# EAGLE board mtr (EAGLE 9.6.2)
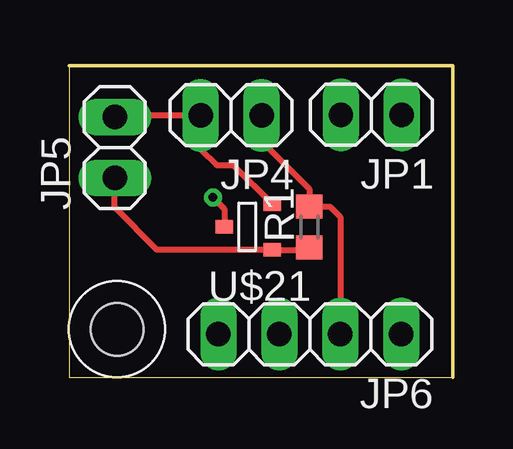
[diagram p0: board, top side]
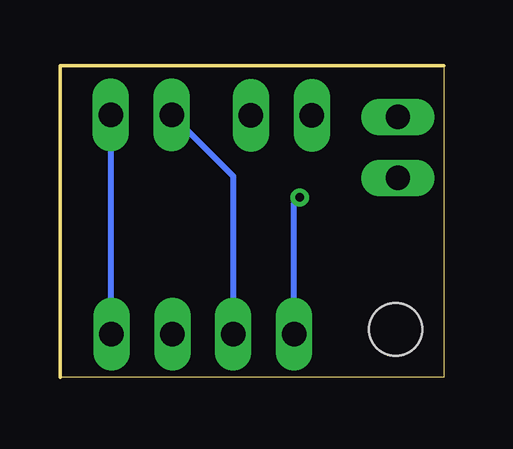
[diagram p1: board, bottom side, seen from below]

Size 16 x 13 mm. Coordinates in mm from the lower left corner, seen from the top.
Outline: 0,0 16,0 16,13 0,13 0,0
Copper layers (1*16): Top 0.035mm / dielectric 1.5mm / Bottom 0.035mm
Design rules "default *": minimum track width 0.25mm, minimum drill 0.35mm, track to track 0.2mm, track to pad 0.2mm, pad to pad 0.15mm, via to via 0.2mm, smd to smd 0.2mm, copper to edge 0.25mm, drill to drill 0.1mm, minimum pad ring 10mil, minimum via ring 8mil, stop-mask expansion 4mil, vias tented up to drill 0mil, thermal gap 10mil
Holes 2.2 mm at 2,2

## Footprints (pad centres in the part's own frame; a part is rotated, then mirrored left to right if it is on the bottom)
1X02 = drill 1.016 long: 1 -1.27,0; 2 1.27,0
1X04 = drill 1.016 long: 1 -3.81,0; 2 -1.27,0; 3 1.27,0; 4 3.81,0
R0603 = smd 1 x 1.1: 1 -0.85,0; 2 0.85,0
SI2302CDS = smd 0.56 x 0.73: 1 -0.95,-1; 2 0.95,-1; 3 0,1

## Placement (x,y rotation side)
JP1  [1X02]  12.61,10.95 180 top
JP4  [1X02]  6.76,10.93 180 top
JP5  [1X02]  1.91,9.59 90 top
JP6  [1X04]  10.04,1.79 180 top
R1  10k  [R0603]  10.02,6.27 90 top
U$21  SI2302CDS  [SI2302CDS]  7.48,6.27 90 top

## Library data of the parts
JP1 JP4-JP6 = pinhead
R1 = rcl; SPICEPREFIX: R
U$21 = CanCubeSat

## Nets
12V: JP4.1 JP6.2 R1.2
GND: JP4.2 JP5.2 U$21.2
MOTOR3+: JP1.2 JP6.3
MOTOR3-: JP1.1 JP6.1
MOTOR-G: JP6.4 U$21.3
N$1: JP5.1 R1.1 U$21.1

## Tracks (layer width: path | path; a pad name or v marks a point on that pad's centre or on a via)
12V
  Top 0.25: JP6.2 11.31,6.69 10.88,7.12 R1.2 10.02,7.86 8.03,9.85 JP4.1
GND
  Top 0.25: U$21.2 6.84,8.86 6.14,8.86 5.49,9.51 JP4.2 1.98,10.93 JP5.2
MOTOR3+
  Bottom 0.25: JP1.2 8.77,8.38 JP6.3
MOTOR3-
  Bottom 0.25: JP1.1 13.88,1.82 JP6.1
MOTOR-G  (via drill 0.35)
  Top 0.25: v6,7.5 6.48,7.02 U$21.3
  Bottom 0.25: JP6.4 6.23,7.27 v6,7.5
N$1
  Top 0.25: R1.1 9.92,5.32 U$21.1 3.68,5.32 1.91,7.09 JP5.1